# Altium PCB Board.PcbDoc (part 3 of 4)
Units mm, origin at the board's own origin, x right, y up, seen from the top; angles counter-clockwise.
Board outline 88 x 92.5 mm, 2 copper layers (Top Layer, Bottom Layer); 85 components, 67 nets, 346 pads, 106 vias.
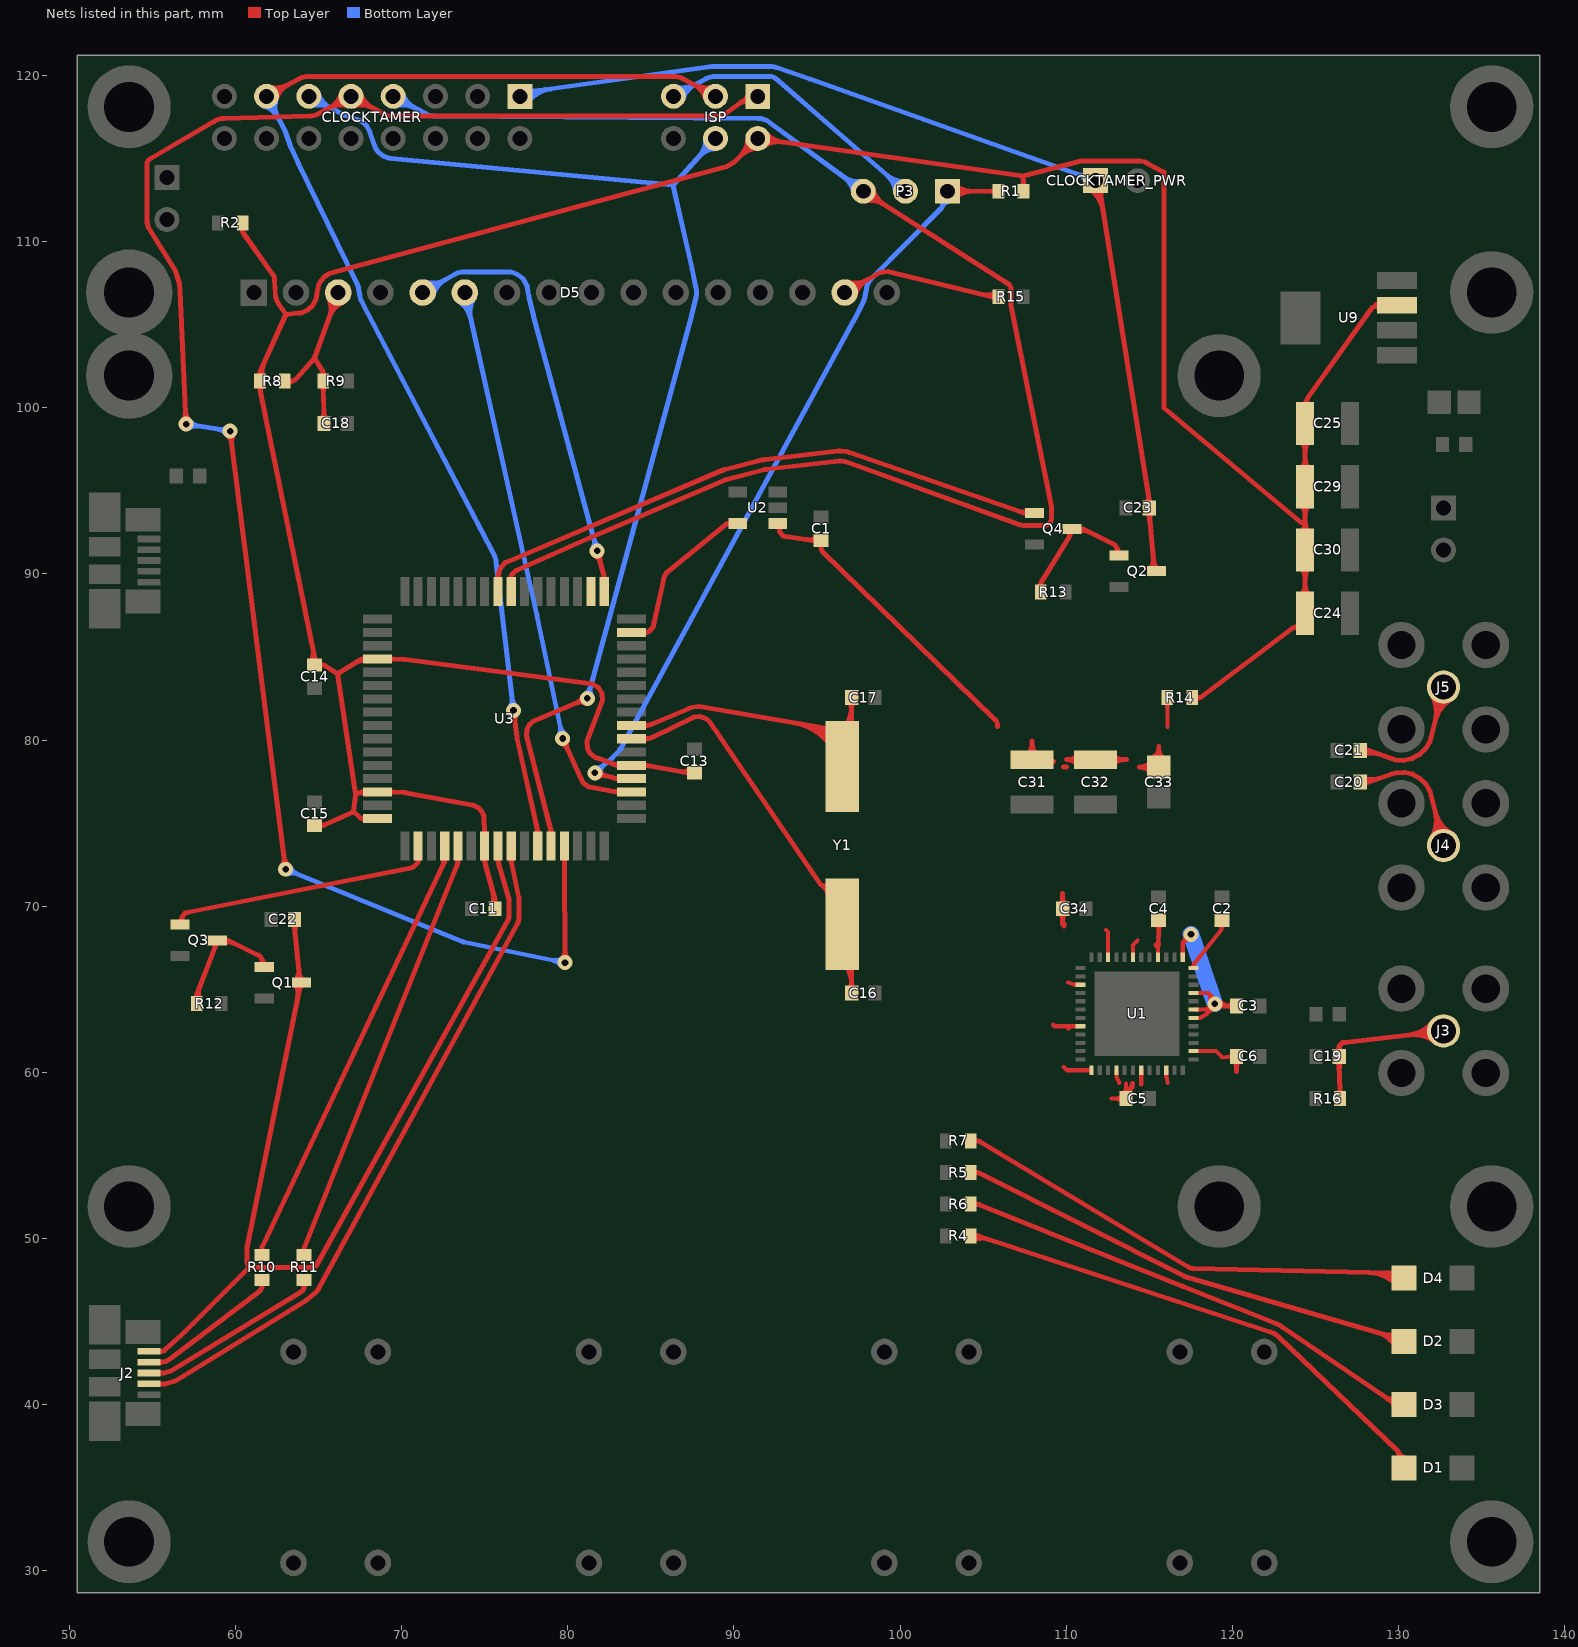
[diagram p3: the nets of this part, all layers, seen from the top]

## Via types
v1: diameter 0.9, hole 0.4, Top Layer to Bottom Layer, tented both sides, 97 vias
v2: diameter 0.8, hole 0.4, Top Layer to Bottom Layer, tented both sides, 9 vias

## Nets (pads, with @x,y where several pads share a name; then routed paths per layer and width w, separated by ;. In a path a pad name is that pad's centre, name@x,y a point inside that pad or via, vN(x,y) a via of type N, cw(c..) or ccw(c..) an arc to the next point about the centre after c; other vN are vias at no path point) (continued)
MISO: CLOCKTAMER.9 ISP.1 U3.13 | length 125.9
  Top Layer w0.3: v1@56.819,99.217 ccw(c56.283,99.704) 57.006,99.739 ccw(c57.73,99.773) v1@57.242,99.237 ; v1(57.041,99.015) 56.657,107.079 56.638,107.469 56.405,108.215 56.198,108.548 54.862,110.69 54.773,110.832 54.68,111.156 54.68,111.325 54.68,114.615 54.68,114.735 54.8,114.943 54.903,115.004 58.735,117.241 58.866,117.318 59.156,117.4 59.307,117.405 64.453,117.545 64.594,117.549 64.864,117.621 64.987,117.687 CLOCKTAMER.9@66.96,118.745 68.933,117.687 69.063,117.618 69.351,117.545 69.5,117.545 88.9,117.545 89.088,117.545 89.444,117.659 89.597,117.768 90.429,118.361 90.486,118.402 90.62,118.445 90.69,118.445 90.84,118.445 ISP.1@91.44,118.745 ; v1@59.504,98.354 cw(c59.061,97.782) 59.779,97.872 cw(c60.498,97.963) v1@59.925,98.407 ; v1(59.688,98.591) v1(63.026,72.226) ; v1@62.789,72.41 ccw(c62.217,72.854) 62.935,72.945 ccw(c63.654,73.035) v1@63.21,72.463 ; CLOCKTAMER.9@66.386,118.919 cw(c64.999,119.337) 65.683,118.061 cw(c66.368,116.784) CLOCKTAMER.9@66.786,118.171 ; CLOCKTAMER.9@67.134,118.171 cw(c67.552,116.784) 68.237,118.061 cw(c68.921,119.337) CLOCKTAMER.9@67.534,118.919 ; v1@79.628,66.812 ccw(c79.112,67.321) 79.837,67.326 ccw(c80.561,67.331) v1@80.052,66.815 ; U3.13@79.712,72.941 cw(c79.505,72.731) 79.8,72.733 ; U3.13@79.717,72.936 cw(c79.556,72.753) 79.8,72.753 ; 79.8,72.724 cw(c80.108,72.726) U3.13@79.889,72.942 ; U3.13@79.8,73.63 79.8,72.905 79.8,72.755 79.8,72.753 ; v1(79.841,66.602) 79.8,72.753 ; U3.13@79.883,72.936 ccw(c80.044,72.753) 79.8,72.753 ; ISP.1@90.716,118.445 cw(c90.716,118.021) ISP.1@91.016,118.321 ; ISP.1@90.841,118.777 cw(c90.455,118.798) 90.573,118.43 cw(c90.706,118.016) ISP.1@91.014,118.322 ; ISP.1@90.85,118.854 cw(c90.255,118.964) 90.44,118.387 cw(c90.647,117.739) ISP.1@91.069,118.274
  Bottom Layer w0.3: v1(57.041,99.015) v1(59.688,98.591) ; v1@57.217,98.772 cw(c57.641,98.185) 57.756,98.901 cw(c57.87,99.616) v1@57.284,99.191 ; v1@59.445,98.415 ccw(c58.858,97.99) 58.973,98.706 ccw(c59.088,99.421) v1@59.512,98.834 ; v1(63.026,72.226) 73.68,67.868 73.709,67.857 73.766,67.839 73.797,67.833 v1(79.841,66.602) ; v1@63.142,71.949 cw(c63.422,71.281) 63.696,71.952 cw(c63.971,72.622) v1@63.303,72.342 ; v1@79.591,66.436 ccw(c78.987,66.036) 79.132,66.746 ccw(c79.276,67.456) v1@79.676,66.852
MOSI: CLOCKTAMER.11 ISP.4 U3.12 | length 78.3
  Top Layer w0.3: U3.12@78.904,74.31 ccw(c78.63,74.541) 78.977,74.63 ; U3.12@78.914,74.32 ccw(c78.721,74.522) 79,74.522 ; U3.12@79,73.63 79,74.355 79,74.505 79,74.522 ; U3.12@79.086,74.32 cw(c79.279,74.522) 79,74.522 ; v1@80.906,82.625 cw(c80.234,82.897) 80.517,82.23 cw(c80.799,81.563) v1@81.071,82.234 ; v1(81.184,82.512) 78.079,81.198 77.929,81.135 77.694,80.913 77.551,80.624 77.517,80.302 77.558,80.145 78.942,74.767 78.942,74.765 78.991,74.573 78.996,74.557 79,74.522
  Bottom Layer w0.3: CLOCKTAMER.11@64.42,118.745 66.393,117.687 66.436,117.665 66.522,117.627 66.567,117.611 67.353,117.339 67.482,117.294 67.712,117.15 67.905,116.957 68.049,116.727 68.094,116.598 68.366,115.812 68.423,115.649 68.622,115.369 68.894,115.155 69.215,115.027 69.387,115.01 86.33,113.4 ; CLOCKTAMER.11@64.594,118.171 cw(c65.012,116.784) 65.697,118.061 cw(c66.381,119.337) CLOCKTAMER.11@64.994,118.919 ; v1@81.035,82.772 ccw(c80.675,83.401) 81.374,83.211 ccw(c82.073,83.02) v1@81.444,82.661 ; v1(81.184,82.512) 87.456,105.513 87.461,105.533 87.726,106.644 87.758,106.778 87.762,107.056 87.733,107.191 87.496,108.318 87.494,108.329 86.33,113.4 ; ISP.4@88.301,116.179 cw(c86.853,116.116) 87.921,115.137 cw(c88.989,114.158) ISP.4@88.926,115.606 ; ISP.4@88.9,116.205 86.33,113.4
ND_CS/D_EN: D5.6 U3.19 | length 40.3
  Top Layer w0.3: v1@79.596,79.817 cw(c79.343,79.138) 80.002,79.439 cw(c80.661,79.739) v1@79.982,79.993 ; v1(79.701,80.098) 80.818,77.651 80.91,77.448 81.263,77.176 81.481,77.138 82.927,76.884 82.939,76.882 82.963,76.88 ; 82.821,76.903 ccw(c82.904,77.374) U3.19@83.178,76.982 ; U3.19@83.158,76.795 ccw(c82.963,76.614) 82.963,76.88 ; U3.19@83.158,76.965 cw(c82.963,77.146) 82.963,76.88 ; U3.19@83.85,76.88 83.125,76.88 82.975,76.88 82.963,76.88
  Bottom Layer w0.3: D5.6@73.462,106.385 cw(c72.621,105.06) 74.152,105.403 cw(c75.684,105.745) D5.6@74.359,106.586 ; D5.6@73.622,106.639 cw(c73.17,105.925) 73.994,106.109 cw(c74.819,106.294) D5.6@74.105,106.746 ; D5.6@73.81,106.934 78.138,87.556 78.141,87.545 v1(79.701,80.098) ; v1@79.45,80.262 ccw(c78.844,80.658) 79.553,80.807 ccw(c80.262,80.955) v1@79.866,80.349
NetC2_2: C2.2 U1.36 | length 4.2
  Top Layer w0.25: 117.662,66.433 ccw(c117.851,66.366) U1.36@117.67,66.28 117.67,66.405 117.67,66.456 117.704,66.553 117.737,66.593 119.261,68.483 119.306,68.54 119.355,68.677 119.355,68.75 119.355,68.875 C2.2@119.38,69.15 ; C2.2@119.213,68.901 cw(c119.107,68.677) 119.355,68.677 cw(c119.653,68.677) C2.2@119.485,68.923
NetC16_2: C16.2 U3.23 Y1.1 | length 32.3
  Top Layer w0.3: U3.23@83.85,80.08 84.575,80.08 84.725,80.08 84.742,80.08 ; U3.23@84.53,80.176 ccw(c84.761,80.45) 84.85,80.103 ; U3.23@84.54,79.994 cw(c84.742,79.801) 84.742,80.08 ; U3.23@84.54,80.166 ccw(c84.742,80.359) 84.742,80.08 ; Y1.1@95.671,70.615 ccw(c94.843,70.571) 95.231,71.304 ccw(c95.589,71.98) Y1.1@96.03,71.355 ; Y1.1@95.674,70.743 ccw(c95.211,70.788) 95.429,71.199 ccw(c95.63,71.579) Y1.1@95.928,71.27 ; Y1.1@96.347,66.979 cw(c94.681,65.241) 97.089,65.292 ; Y1.1@96.555,67.196 cw(c95.39,65.98) 97.073,66.016 ; C16.2@96.909,64.993 ccw(c96.452,65.431) 97.085,65.444 ; C16.2@96.977,65.043 ccw(c96.885,65.226) 97.09,65.229 ; 97.086,65.403 ccw(c97.66,65.415) C16.2@97.263,65.001 ; C16.2@97.09,64.77 97.09,65.07 97.09,65.22 97.09,65.229 ; C16.2@97.205,65.042 cw(c97.303,65.231) 97.09,65.229 ; 84.742,80.08 84.777,80.084 84.793,80.089 84.985,80.138 85.037,80.151 85.137,80.188 85.184,80.21 87.467,81.319 87.612,81.39 87.936,81.421 88.249,81.338 88.513,81.151 88.604,81.017 95.148,71.407 95.211,71.315 95.408,71.21 95.52,71.21 95.67,71.21 Y1.1@96.52,68.91 97.07,66.31 97.07,66.16 97.09,65.229
NetC17_2: C17.2 U3.24 Y1.2 | length 41.7
  Top Layer w0.3: U3.24@83.85,80.88 84.575,80.88 84.725,80.88 84.742,80.88 ; U3.24@84.53,80.976 ccw(c84.761,81.25) 84.85,80.903 ; U3.24@84.54,80.794 cw(c84.742,80.601) 84.742,80.88 ; U3.24@84.54,80.966 ccw(c84.742,81.159) 84.742,80.88 ; 93.694,81.02 cw(c93.13,77.773) Y1.2@95.825,79.671 ; 94.407,80.896 cw(c93.968,78.363) Y1.2@96.07,79.843 ; 94.44,80.891 cw(c94.149,79.212) Y1.2@95.731,79.844 ; 94.969,80.799 cw(c94.735,79.446) Y1.2@96.009,79.956 ; 95.121,80.772 cw(c94.805,78.952) Y1.2@96.316,80.016 ; 95.478,80.711 cw(c95.298,79.653) Y1.2@96.289,80.064 ; 95.488,80.709 cw(c95.311,79.669) Y1.2@96.288,80.066 ; 95.499,80.707 cw(c95.32,79.68) Y1.2@96.288,80.067 ; Y1.2@96.347,80.341 ccw(c94.681,82.079) 97.089,82.028 ; Y1.2@96.555,80.124 ccw(c95.39,81.34) 97.073,81.304 ; C17.2@96.909,82.327 cw(c96.452,81.889) 97.085,81.876 ; 97.086,81.917 cw(c97.66,81.905) C17.2@97.263,82.319 ; C17.2@97.09,82.55 97.09,82.25 97.09,82.1 97.09,82.091 97.07,81.16 97.07,81.01 Y1.2@96.52,78.41 95.67,80.71 95.52,80.71 95.501,80.71 95.462,80.713 95.443,80.717 88.116,81.988 87.903,82.025 87.477,81.976 87.277,81.892 85.133,80.988 85.097,80.972 85.023,80.947 84.985,80.938 84.793,80.889 84.777,80.884 84.742,80.88 ; 95.427,80.719 ccw(c95.565,81.516) 96.031,80.855 cw(c95.565,81.516) 95.427,80.719 ; 95.435,80.718 ccw(c95.568,81.502) 96.028,80.853 cw(c95.568,81.502) 95.435,80.718 ; Y1.2@95.572,80.704 cw(c95.448,79.258) 96.558,80.192 ccw(c95.448,79.258) Y1.2@95.572,80.704 ; Y1.2@95.623,80.7 ccw(c95.664,81.178) 95.973,80.81 cw(c95.664,81.178) Y1.2@95.623,80.7
NetC18_1: C18.1 D5.3 R8.1 R9.2 | length 18.1
  Top Layer w0.3: R8.1@62.98,101.6 63.18,101.6 63.33,101.6 63.427,101.6 ; R8.1@63.129,101.467 cw(c63.426,101.202) 63.426,101.6 ; R8.1@63.129,101.733 ccw(c63.427,101.999) 63.426,101.6 ; R8.1@63.14,101.621 ccw(c63.28,101.727) 63.352,101.566 ; R9.2@65.153,101.354 cw(c64.848,101.03) 65.293,101.043 ; C18.1@65.158,99.281 ccw(c64.687,99.724) 65.333,99.744 ; R9.2@65.17,101.86 ccw(c64.99,102.1) 65.29,102.1 ; C18.1@65.226,99.332 ccw(c65.13,99.519) 65.34,99.522 ; 65.295,100.991 cw(c65.814,101.007) R9.2@65.436,101.363 ; 65.335,99.684 ccw(c65.896,99.701) C18.1@65.511,99.292 ; C18.1@65.34,99.06 65.34,99.36 65.34,99.51 65.34,99.522 ; R9.2@65.41,101.86 cw(c65.59,102.1) 65.29,102.1 ; C18.1@65.457,99.331 cw(c65.561,99.526) 65.34,99.522 ; D5.3@65.601,106.659 cw(c64.18,105.994) 65.655,105.459 cw(c67.13,104.924) D5.3@66.465,106.345 ; D5.3@65.873,106.786 cw(c65.108,106.428) 65.902,106.14 cw(c66.696,105.852) D5.3@66.338,106.617 ; D5.3@66.19,106.934 64.76,102.99 ; 63.427,101.6 63.603,101.679 63.667,101.752 64.76,102.99 ; 64.76,102.99 65.236,102.237 65.262,102.195 65.29,102.1 ; 65.29,102.1 65.29,102.05 65.29,101.9 R9.2@65.29,101.6 65.29,101.3 65.29,101.15 65.29,101.139 65.34,99.522
NetC19_1: C19.1 J3.1 R16.1 | length 17.9
  Top Layer w0.3: C19.1@126.259,60.728 cw(c125.874,60.319) 126.435,60.336 ; C19.1@126.265,61.198 ccw(c125.945,61.562) 126.43,61.562 ; R16.1@126.334,58.657 ccw(c125.956,59.013) 126.475,59.029 ; R16.1@126.376,58.691 ccw(c126.262,58.877) 126.48,58.881 ; 126.437,60.276 cw(c127.083,60.296) C19.1@126.612,60.739 ; 126.477,58.977 ccw(c126.922,58.99) R16.1@126.617,58.666 ; R16.1@126.48,58.42 126.48,58.72 126.48,58.87 126.48,58.881 ; R16.1@126.588,58.689 cw(c126.713,58.885) 126.48,58.881 ; C19.1@126.595,61.198 cw(c126.915,61.562) 126.43,61.562 ; J3.1@132.048,63.027 cw(c130.439,64.3) 130.677,62.262 cw(c130.915,60.224) J3.1@132.188,61.833 ; J3.1@132.284,62.841 cw(c131.242,63.665) 131.396,62.346 cw(c131.55,61.027) J3.1@132.374,62.069 ; J3.1@132.715,62.5 126.784,61.807 126.633,61.79 126.43,61.562 ; 126.43,61.562 126.43,61.41 126.43,61.26 C19.1@126.43,60.96 126.43,60.66 126.43,60.51 126.43,60.498 126.48,58.881
NetC20_1: C20.1 J4.1 | length 15.4
  Top Layer w0.3: C20.1@127.678,77.475 ccw(c127.927,77.984) 128.111,77.448 ; C20.1@127.7,77.47 127.95,77.47 128.1,77.47 128.137,77.47 ; C20.1@127.81,77.745 ccw(c128.377,78.904) 128.796,77.683 ; C20.1@127.916,77.343 cw(c128.137,77.213) 128.137,77.47 ; C20.1@127.916,77.597 ccw(c128.137,77.727) 128.137,77.47 ; J4.1@131.986,74.098 ccw(c130.227,75.155) 132.218,75.651 ccw(c134.21,76.148) J4.1@133.153,74.389 ; J4.1@132.244,73.943 ccw(c131.105,74.627) 132.394,74.948 ccw(c133.682,75.27) J4.1@132.998,74.131 ; J4.1@132.715,73.66 131.97,76.648 131.908,76.897 131.653,77.342 131.283,77.703 130.832,77.948 130.331,78.061 129.819,78.033 129.575,77.95 128.246,77.494 128.211,77.482 128.137,77.47
NetC21_1: C21.1 J5.1 | length 15.4
  Top Layer w0.3: C21.1@127.678,79.37 cw(c127.927,78.861) 128.111,79.397 ; C21.1@127.7,79.375 127.95,79.375 128.1,79.375 128.137,79.375 ; C21.1@127.81,79.1 cw(c128.377,77.941) 128.796,79.162 ; C21.1@127.915,79.248 cw(c128.137,79.118) 128.137,79.375 ; C21.1@127.915,79.502 ccw(c128.137,79.632) 128.137,79.375 ; J5.1@131.986,82.747 cw(c130.227,81.69) 132.218,81.194 cw(c134.21,80.697) J5.1@133.153,82.456 ; J5.1@132.244,82.902 cw(c131.105,82.218) 132.394,81.897 cw(c133.682,81.575) J5.1@132.998,82.714 ; J5.1@132.715,83.185 131.97,80.197 131.908,79.948 131.652,79.502 131.285,79.143 130.835,78.898 130.33,78.784 129.818,78.812 129.575,78.895 128.246,79.351 128.211,79.363 128.137,79.375
NetD1_1: D1.1 R4.1 | length 34.8
  Top Layer w0.3: R4.1@104.21,50.154 cw(c104.45,49.678) 104.617,50.185 ; R4.1@104.255,50.165 104.455,50.165 104.605,50.165 104.64,50.165 ; R4.1@104.345,49.886 cw(c104.912,48.764) 105.305,49.959 ; R4.1@104.418,50.05 cw(c104.641,49.892) 104.64,50.165 ; R4.1@104.419,50.28 ccw(c104.64,50.435) 104.64,50.165 ; D1.1@129.885,36.597 ccw(c129.494,36.951) 129.978,37.158 ccw(c130.561,37.407) D1.1@130.443,36.784 ; D1.1@129.905,36.619 ccw(c129.603,36.92) D1.1@130.03,36.921 ; D1.1@129.967,36.673 ccw(c129.806,36.884) 130.051,36.989 ccw(c130.345,37.114) D1.1@130.339,36.795 ; D1.1@130.33,36.195 130.03,36.795 130.03,36.945 130.03,37.037 129.958,37.206 129.891,37.27 122.785,44.082 122.684,44.179 122.443,44.324 122.31,44.368 104.746,50.143 104.711,50.154 104.64,50.165
NetD2_1: D2.1 R5.1 | length 38.5
  Top Layer w0.3: R5.1@104.255,53.975 104.455,53.975 104.605,53.975 104.658,53.975 ; R5.1@104.414,53.854 cw(c104.658,53.669) 104.658,53.975 ; R5.1@104.414,54.096 ccw(c104.658,54.281) 104.658,53.975 ; 128.814,44.319 cw(c128.352,42.726) D2.1@129.804,43.526 ; 129.098,44.236 ccw(c129.443,45.426) D2.1@130.041,44.341 ; 129.425,44.133 cw(c129.305,43.288) D2.1@130.063,43.678 ; 129.464,44.127 cw(c129.354,43.357) D2.1@130.058,43.687 ; 129.509,44.117 cw(c129.249,43.22) D2.1@130.067,43.67 ; D2.1@129.606,44.115 ccw(c129.606,44.539) D2.1@129.906,44.239 ; D2.1@129.734,43.747 ccw(c129.261,43.693) 129.394,44.15 ccw(c129.557,44.71) D2.1@129.938,44.269 ; D2.1@129.736,43.729 ccw(c129.215,43.654) 129.362,44.16 ccw(c129.542,44.781) D2.1@129.951,44.28 ; D2.1@129.736,43.73 ccw(c129.217,43.656) 129.364,44.159 ccw(c129.543,44.775) D2.1@129.95,44.279 ; D2.1@130.33,43.815 129.73,44.115 129.58,44.115 129.548,44.115 129.485,44.124 129.455,44.133 117.327,47.65 117.275,47.666 117.171,47.706 117.122,47.731 104.807,53.927 104.76,53.951 104.658,53.975 ; 129.368,44.141 ccw(c129.483,44.944) 129.97,44.295 cw(c129.483,44.944) 129.368,44.141
NetD3_1: D3.1 R6.1 | length 32.1
  Top Layer w0.3: R6.1@104.255,52.07 104.455,52.07 104.605,52.07 104.648,52.07 ; R6.1@104.417,51.952 cw(c104.648,51.784) 104.648,52.07 ; R6.1@104.417,52.188 ccw(c104.648,52.356) 104.648,52.07 ; D3.1@129.603,40.305 ccw(c129.604,40.733) D3.1@129.906,40.43 ; D3.1@129.731,39.966 ccw(c129.329,39.94) 129.448,40.325 ccw(c129.586,40.773) D3.1@129.913,40.436 ; D3.1@129.741,39.893 ccw(c129.138,39.779) 129.319,40.365 ccw(c129.529,41.047) D3.1@129.964,40.481 ; D3.1@130.33,40.005 129.73,40.305 129.58,40.305 129.512,40.305 129.383,40.345 129.327,40.383 122.96,44.71 122.877,44.766 122.697,44.862 122.604,44.899 116.996,47.13 116.991,47.132 104.773,52.038 104.733,52.054 104.648,52.07
NetD4_1: D4.1 R7.1 | length 32.5
  Top Layer w0.3: R7.1@104.255,55.88 104.455,55.88 104.605,55.88 104.666,55.88 ; R7.1@104.412,55.757 cw(c104.666,55.558) 104.666,55.88 ; R7.1@104.412,56.003 ccw(c104.666,56.202) 104.666,55.88 ; 128.207,47.957 cw(c128.151,45.545) D4.1@129.896,47.211 ; 128.931,47.94 cw(c128.891,46.252) D4.1@130.113,47.418 ; 129.57,47.925 ccw(c129.581,48.409) D4.1@129.916,48.059 ; D4.1@130.33,47.625 129.73,47.925 129.58,47.925 117.648,48.203 117.57,48.205 117.419,48.248 117.353,48.288 104.837,55.816 104.784,55.847 104.666,55.88
NetJ2_2: J2.2 R10.1 | length 9.8
  Top Layer w0.3: J2.2@54.81,42.56 55.35,42.56 55.5,42.56 55.611,42.56 55.826,42.616 55.924,42.669 56.008,42.716 56.042,42.735 56.105,42.776 56.134,42.798 61.417,46.801 61.501,46.865 61.595,47.054 ; J2.2@55.325,42.603 ccw(c55.521,42.935) 55.618,42.562 ; R10.1@61.46,47.363 cw(c61.175,47.054) 61.595,47.054 ; R10.1@61.595,47.51 61.595,47.31 61.595,47.16 61.595,47.054 ; R10.1@61.73,47.363 ccw(c62.015,47.054) 61.595,47.054
NetJ2_3: J2.3 R11.1 | length 12
  Top Layer w0.3: J2.3@54.81,41.91 55.35,41.91 55.5,41.91 55.709,41.91 56.114,42.023 56.293,42.132 63.919,46.776 64.02,46.837 64.135,47.042 ; R11.1@63.997,47.365 cw(c63.688,47.042) 64.135,47.042 ; R11.1@64.135,47.51 64.135,47.31 64.135,47.16 64.135,47.042 ; R11.1@64.273,47.365 ccw(c64.582,47.042) 64.135,47.042
NetP2_5: ISP.5 P3.2 | length 21.4
  Bottom Layer w0.3: ISP.5@86.36,118.745 88.333,119.803 88.465,119.873 88.753,119.945 88.9,119.945 92.19,119.945 92.271,119.945 92.424,119.888 92.485,119.835 P3.2@100.33,113.03 ; ISP.5@86.534,119.319 ccw(c86.952,120.706) 87.637,119.429 ccw(c88.321,118.153) ISP.5@86.934,118.571 ; P3.2@99.732,112.988 ccw(c98.287,112.885) 99.236,113.979 ccw(c100.185,115.073) P3.2@100.288,113.628
NetQ1_1: Q1.1 Q3.3 R12.1 | length 11.2
  Top Layer w0.3: R12.1@57.556,64.399 ccw(c57.405,64.617) 57.67,64.617 ; R12.1@57.67,64.135 57.67,64.435 57.67,64.585 57.67,64.617 ; R12.1@57.784,64.399 cw(c57.935,64.617) 57.67,64.617 ; 57.832,65.073 ccw(c58.756,64.72) R12.1@57.853,64.317 ; 58.757,67.455 cw(c59.319,67.351) Q3.3@58.995,67.821 ; Q3.3@59.234,67.803 cw(c59.531,66.935) 59.934,67.759 ; Q3.3@59.297,67.845 cw(c59.519,67.648) 59.519,67.945 cw(c59.519,68.242) Q3.3@59.297,68.045 ; Q1.1@61.626,66.452 ccw(c61.443,66.607) 61.646,66.734 ; Q1.1@61.74,66.355 61.615,66.505 61.615,66.655 61.615,66.784 ; Q1.1@61.803,66.491 cw(c61.937,66.784) 61.615,66.784 ; 57.67,64.617 57.682,64.681 57.693,64.71 58.755,67.484 58.77,67.522 58.785,67.604 58.785,67.645 58.785,67.795 Q3.3@58.91,67.945 59.335,67.945 59.485,67.945 59.519,67.945 59.586,67.93 59.617,67.914 61.363,67.059 61.479,67.002 61.615,66.784
NetQ2_1: Q2.1 Q4.3 R13.1 | length 11.2
  Top Layer w0.3: R13.1@108.35,89.16 ccw(c108.173,89.398) 108.47,89.398 ; R13.1@108.47,88.9 108.47,89.2 108.47,89.35 108.47,89.399 ; R13.1@108.59,89.16 cw(c108.767,89.398) 108.47,89.398 ; 110.212,92.319 cw(c110.629,92.2) Q4.3@110.418,92.579 ; Q4.3@110.214,92.637 cw(c109.96,92.496) Q4.3@110.24,92.416 ; 110.22,92.327 cw(c110.475,92.327) Q4.3@110.393,92.568 ; Q4.3@110.669,92.568 cw(c110.966,91.7) 111.369,92.524 ; Q4.3@110.732,92.61 cw(c110.954,92.413) 110.954,92.71 cw(c110.954,93.007) Q4.3@110.732,92.81 ; Q2.1@113.061,91.217 ccw(c112.878,91.372) 113.081,91.499 ; Q2.1@113.175,91.12 113.05,91.27 113.05,91.42 113.05,91.549 ; Q2.1@113.238,91.256 cw(c113.372,91.549) 113.05,91.549 ; 108.47,89.399 108.497,89.493 108.522,89.534 110.153,92.174 110.186,92.227 110.22,92.347 110.22,92.41 110.22,92.56 Q4.3@110.345,92.71 110.77,92.71 110.92,92.71 110.954,92.71 111.021,92.695 111.052,92.679 112.798,91.824 112.914,91.767 113.05,91.549
NRD: U3.34
NRESET: P3.1 R1.1 U3.20 | length 55
  Top Layer w0.3: v1(81.637,78.024) 82.705,77.74 82.715,77.738 82.907,77.689 82.924,77.684 82.958,77.68 ; v1@81.787,77.765 cw(c82.151,77.138) 82.337,77.838 cw(c82.523,78.538) v1@81.896,78.175 ; 82.85,77.703 ccw(c82.939,78.05) U3.20@83.17,77.776 ; U3.20@83.16,77.594 ccw(c82.958,77.401) 82.958,77.68 ; U3.20@83.16,77.766 cw(c82.958,77.959) 82.958,77.68 ; U3.20@83.85,77.68 83.125,77.68 82.975,77.68 82.958,77.68 ; P3.1@102.87,113.03 103.47,113.03 103.62,113.03 105.58,113.03 105.73,113.03 R1.1@105.93,113.03 ; P3.1@103.294,112.606 cw(c104.319,111.581) 104.319,113.03 cw(c104.319,114.479) P3.1@103.294,113.454 ; R1.1@105.789,112.889 ccw(c105.447,112.547) 105.447,113.03 ccw(c105.447,113.513) R1.1@105.789,113.171
  Bottom Layer w0.3: v1(81.637,78.024) 82.619,78.874 82.628,78.882 82.645,78.898 82.653,78.906 83.08,79.333 83.113,79.366 83.169,79.441 83.192,79.482 97.195,105.198 97.291,105.373 97.303,105.395 97.79,106.379 97.829,106.457 97.885,106.625 97.9,106.713 97.98,107.155 98.014,107.343 98.189,107.68 98.323,107.815 102.439,111.963 102.502,112.026 102.57,112.191 102.57,112.28 102.57,112.43 P3.1@102.87,113.03 ; v1@81.658,78.323 ccw(c81.71,79.046) 82.184,78.498 ccw(c82.658,77.95) v1@81.936,78.003 ; P3.1@102.422,112.631 cw(c102.018,112.271) 102.518,112.065 cw(c103.094,111.829) P3.1@102.98,112.44 ; P3.1@102.446,112.606 cw(c102.146,112.306) P3.1@102.57,112.306 ; P3.1@102.5,112.558 cw(c102.326,112.337) 102.586,112.23 cw(c102.885,112.107) P3.1@102.88,112.43
NWR: D5.5 U3.33 | length 33
  Top Layer w0.3: v1@81.622,91.129 cw(c81.266,90.498) 81.964,90.692 cw(c82.662,90.886) v1@82.031,91.242 ; v1(81.77,91.39) 82.19,89.879 82.195,89.86 82.2,89.824 ; U3.33@82.091,89.591 ccw(c81.58,89.881) 82.146,90.038 ; U3.33@82.113,89.62 ccw(c81.918,89.824) 82.2,89.824 ; U3.33@82.2,88.93 82.2,89.655 82.2,89.805 82.2,89.824 ; U3.33@82.287,89.62 cw(c82.482,89.824) 82.2,89.824
  Bottom Layer w0.3: D5.5@71.27,106.934 73.195,108.022 73.336,108.102 73.648,108.184 73.81,108.184 76.35,108.184 76.571,108.184 76.983,108.034 77.321,107.751 77.541,107.372 77.58,107.155 77.66,106.713 77.674,106.645 77.939,105.533 77.943,105.514 v1(81.77,91.39) ; D5.5@71.364,107.271 ccw(c71.59,108.085) 72.006,107.35 ccw(c72.421,106.614) D5.5@71.607,106.84 ; D5.5@71.444,107.56 ccw(c71.864,109.072) 72.636,107.706 ccw(c73.408,106.34) D5.5@71.896,106.76 ; v1@81.51,91.539 ccw(c80.882,91.9) 81.581,92.089 ccw(c82.28,92.278) v1@81.919,91.65
RESET_CT: CLOCKTAMER.7 P3.3 U3.40 | length 98.1
  Top Layer w0.3: U3.40@76.512,89.618 ccw(c76.298,89.832) 76.6,89.832 ccw(c76.902,89.832) U3.40@76.688,89.618 ; 76.594,89.847 ccw(c76.749,89.782) U3.40@76.664,89.638 ; U3.40@76.6,88.93 76.6,89.655 76.6,89.805 76.6,89.86 76.643,89.963 76.683,90.001 76.81,90.126 76.839,90.155 76.904,90.199 76.941,90.216 81.402,92.211 81.417,92.218 89.514,95.669 89.529,95.676 89.561,95.686 89.577,95.691 91.827,96.272 91.863,96.281 91.936,96.294 91.972,96.298 96.346,96.793 96.449,96.804 96.655,96.78 96.753,96.745 107.162,92.973 107.249,92.942 107.428,92.91 107.52,92.91 108.67,92.91 108.76,92.91 108.925,92.979 109.052,93.105 109.12,93.271 109.12,93.36 109.12,93.96 109.12,93.982 109.116,94.027 109.111,94.048 106.688,106.151 106.684,106.171 106.68,106.21 106.68,106.23 106.68,107.13 106.68,107.233 106.581,107.412 106.495,107.467 P3.3@97.79,113.03 ; P3.3@97.919,112.444 cw(c98.231,111.029) 99.011,112.25 cw(c99.791,113.471) P3.3@98.376,113.159
  Bottom Layer w0.3: CLOCKTAMER.7@69.5,118.745 71.473,117.687 71.601,117.619 71.884,117.546 72.031,117.545 91.449,117.405 91.638,117.404 91.997,117.285 92.15,117.172 P3.3@97.79,113.03 ; CLOCKTAMER.7@69.674,118.171 cw(c70.092,116.784) 70.777,118.061 cw(c71.461,119.337) CLOCKTAMER.7@70.074,118.919 ; P3.3@97.197,112.939 ccw(c95.765,112.72) 96.623,113.887 ccw(c97.48,115.055) P3.3@97.699,113.623
SCK: CLOCKTAMER.13 ISP.3 U3.11 | length 86.2
  Top Layer w0.3: CLOCKTAMER.13@61.88,118.745 63.853,119.803 63.985,119.873 64.273,119.945 64.42,119.945 86.36,119.945 86.509,119.945 86.797,119.872 86.927,119.803 ISP.3@88.9,118.745 ; CLOCKTAMER.13@62.054,119.319 ccw(c62.472,120.706) 63.157,119.429 ccw(c63.841,118.153) CLOCKTAMER.13@62.454,118.571 ; v1@76.555,81.553 cw(c76.111,80.981) 76.829,81.071 cw(c77.548,81.161) v1@76.976,81.606 ; v1(76.739,81.79) 76.941,80.183 76.946,80.146 76.958,80.077 76.966,80.041 78.193,74.565 78.197,74.551 78.2,74.52 ; U3.11@78.094,74.297 ccw(c77.647,74.581) 78.164,74.696 ; U3.11@78.114,74.321 ccw(c77.925,74.52) 78.2,74.52 ; U3.11@78.2,73.63 78.2,74.355 78.2,74.505 78.2,74.52 ; U3.11@78.286,74.321 cw(c78.475,74.52) 78.2,74.52 ; ISP.3@88.326,118.571 ccw(c86.939,118.153) 87.623,119.429 ccw(c88.308,120.706) ISP.3@88.726,119.319
  Bottom Layer w0.3: CLOCKTAMER.13@61.706,118.171 cw(c61.288,116.784) 62.564,117.468 cw(c63.841,118.153) CLOCKTAMER.13@62.454,118.571 ; CLOCKTAMER.13@61.88,118.745 62.938,116.772 62.96,116.73 62.998,116.643 63.014,116.598 63.286,115.812 63.296,115.784 63.318,115.728 63.331,115.701 63.782,114.728 63.787,114.716 67.314,107.482 67.351,107.405 67.405,107.241 67.42,107.155 67.5,106.713 67.517,106.618 67.579,106.438 67.622,106.355 75.529,91.235 75.593,91.114 75.674,90.851 75.69,90.715 v1(76.739,81.79) ; v1@76.504,81.976 ccw(c75.935,82.424) 76.655,82.509 ccw(c77.374,82.593) v1@76.925,82.025
TEST_CLK: U2.5 U3.31 | length 11.4
  Top Layer w0.3: U3.31@83.85,86.48 84.575,86.48 84.725,86.48 84.78,86.48 84.883,86.523 84.921,86.562 85.046,86.69 85.091,86.735 85.151,86.846 85.164,86.908 85.78,89.681 85.812,89.829 85.971,90.087 86.089,90.184 89.484,92.957 89.528,92.992 89.634,93.03 ; U3.31@84.538,86.392 cw(c84.752,86.178) 84.752,86.48 cw(c84.752,86.782) U3.31@84.538,86.568 ; U3.31@84.558,86.544 ccw(c84.702,86.629) 84.767,86.474 ; U2.5@89.882,92.916 ccw(c89.634,92.703) 89.634,93.03 ; U2.5@89.882,93.144 cw(c89.634,93.357) 89.634,93.03 ; U2.5@90.24,93.03 89.84,93.03 89.69,93.03 89.634,93.03
UID: J2.4 U3.9 | length 42.5
  Top Layer w0.3: J2.4@54.81,41.26 55.35,41.26 55.5,41.26 55.802,41.26 56.383,41.424 56.641,41.584 64.236,46.266 64.275,46.29 64.35,46.346 64.385,46.377 64.885,46.825 64.914,46.85 64.962,46.911 64.98,46.945 76.952,68.897 77.015,69.014 77.08,69.269 77.08,69.4 77.08,70.3 77.08,70.353 77.069,70.461 77.058,70.513 76.606,72.699 76.603,72.713 76.6,72.741 ; U3.9@76.514,72.939 cw(c76.329,72.741) 76.6,72.741 ; U3.9@76.6,73.63 76.6,72.905 76.6,72.755 76.6,72.741 ; 76.631,72.577 cw(c77.132,72.68) U3.9@76.704,72.961 ; U3.9@76.686,72.939 ccw(c76.871,72.741) 76.6,72.741
USB_BUSVCC: C22.1 J2.1 Q1.3 U3.8 | length 68.4
  Top Layer w0.3: J2.1@54.81,43.21 55.35,43.21 55.5,43.21 55.579,43.21 55.727,43.267 55.785,43.32 56.773,44.212 56.806,44.243 60.87,48.3 ; J2.1@55.326,43.253 ccw(c55.501,43.545) 55.623,43.227 ; C22.1@63.407,68.972 cw(c63.114,68.614) 63.574,68.66 ; C22.1@63.451,68.943 cw(c63.354,68.755) 63.565,68.755 ; C22.1@63.565,69.215 63.565,68.915 63.565,68.765 63.565,68.755 ; Q1.3@63.59,65.322 cw(c62.675,64.715) 63.751,64.498 ; 63.593,68.461 cw(c64.335,68.534) C22.1@63.758,69.007 ; Q1.3@63.599,65.5 ccw(c62.84,66.121) 63.816,66.218 ; C22.1@63.679,68.943 ccw(c63.776,68.755) 63.565,68.755 ; 63.84,65.978 ccw(c64.515,66.045) Q1.3@64.085,65.521 ; 63.865,65.059 cw(c64.07,65.059) Q1.3@64.024,65.259 ; Q1.3@64.008,65.554 cw(c64.028,65.716) 63.865,65.716 ; U3.8@75.714,72.94 cw(c75.521,72.738) 75.8,72.738 ; U3.8@75.8,73.63 75.8,72.905 75.8,72.755 75.8,72.738 ; 75.823,72.63 cw(c76.17,72.719) U3.8@75.896,72.95 ; U3.8@75.886,72.94 ccw(c76.079,72.738) 75.8,72.738 ; 60.87,48.3 61.08,48.265 61.096,48.263 61.128,48.26 61.145,48.26 64.585,48.26 64.694,48.26 64.882,48.37 64.935,48.466 76.423,69.182 76.451,69.232 76.48,69.343 76.48,69.4 76.48,70.3 76.48,70.332 76.471,70.395 76.462,70.426 75.867,72.46 75.858,72.495 75.809,72.687 75.804,72.703 75.8,72.738 ; 60.87,48.3 60.832,48.336 60.767,48.4 60.695,48.568 60.695,48.66 60.695,49.36 60.695,49.382 60.7,49.427 60.704,49.449 63.856,65.016 63.86,65.038 63.865,65.083 63.865,65.105 63.865,65.255 Q1.3@63.99,65.405 63.865,65.555 63.865,65.705 63.865,65.716 ; 63.565,68.755 63.566,68.735 63.567,68.725 63.863,65.75 63.864,65.739 63.865,65.716 ; 63.839,64.932 cw(c64.376,64.824) Q1.3@64.073,65.28 ; 63.839,64.932 cw(c64.376,64.824) Q1.3@64.073,65.28 ; 63.839,64.933 cw(c64.375,64.824) Q1.3@64.073,65.28
USB_DM: R10.2 U3.4 | length 28.7
  Top Layer w0.3: R10.2@61.475,49.17 ccw(c61.295,49.41) 61.595,49.41 ccw(c61.895,49.41) R10.2@61.715,49.17 ; R10.2@61.595,49.01 61.595,49.21 61.595,49.36 61.595,49.41 61.617,49.508 61.638,49.553 72.573,72.637 72.586,72.665 72.6,72.724 72.6,72.755 72.6,72.905 U3.4@72.6,73.63 ; 72.452,72.381 ccw(c71.735,72.721) U3.4@72.482,72.988 ; U3.4@72.512,72.942 cw(c72.298,72.728) 72.6,72.728 cw(c72.902,72.728) U3.4@72.688,72.942
USB_DP: R11.2 U3.5 | length 27.7
  Top Layer w0.3: R11.2@64.017,49.172 ccw(c63.847,49.404) 64.135,49.403 ; R11.2@64.135,49.01 64.135,49.21 64.135,49.36 64.135,49.403 ; R11.2@64.253,49.172 cw(c64.421,49.403) 64.135,49.403 ; U3.5@73.304,72.95 cw(c73.03,72.719) 73.377,72.63 ; U3.5@73.314,72.94 cw(c73.121,72.738) 73.4,72.738 ; U3.5@73.4,73.63 73.4,72.905 73.4,72.755 73.4,72.738 ; U3.5@73.486,72.94 ccw(c73.679,72.738) 73.4,72.738 ; 64.135,49.403 64.151,49.488 64.167,49.527 73.3,72.365 73.313,72.397 73.334,72.462 73.342,72.495 73.391,72.687 73.396,72.704 73.4,72.738
UVCON: Q3.1 U3.2 | length 17.3
  Top Layer w0.3: Q3.1@56.589,69.027 ccw(c56.411,69.356) 56.785,69.356 ; Q3.1@56.66,68.895 56.785,69.045 56.785,69.195 56.785,69.356 ; U3.2@70.912,72.942 cw(c70.698,72.728) 71,72.728 cw(c71.302,72.728) U3.2@71.088,72.942 ; U3.2@70.936,72.922 cw(c70.851,72.778) 71.006,72.713 ; U3.2@71,73.63 71,72.905 71,72.755 71,72.7 70.957,72.597 70.918,72.559 70.79,72.434 70.744,72.388 70.627,72.327 70.563,72.314 57.147,69.636 56.989,69.605 56.785,69.356
VCC: C11.2 C13.1 C14.2 C15.2 C24.2 C25.2 C29.2 C30.2 ISP.2 R1.2 R2.1 R8.2 R14.2 U3.7 U3.21 U3.52 U3.62 U3.64 U9.3 | length 232.1
  Top Layer w0.3: R2.1@60.318,110.866 cw(c60.13,110.62) 60.44,110.62 ; R2.1@60.44,111.125 60.44,110.62 ; R2.1@60.562,110.866 ccw(c60.75,110.62) 60.44,110.62 ; R8.2@61.364,101.863 ccw(c61.205,102.087) 61.48,102.087 ; R8.2@61.371,101.332 cw(c61.242,101.132) 61.48,101.132 ; 61.538,100.829 cw(c62.269,100.978) R8.2@61.647,101.39 ; R8.2@61.589,101.332 ccw(c61.718,101.132) 61.48,101.132 ; R8.2@61.596,101.863 cw(c61.755,102.087) 61.48,102.087 ; R8.2@61.667,101.771 cw(c62.674,102.154) 61.691,102.595 ; C14.2@64.511,84.658 ccw(c63.616,85.251) 64.668,85.465 ; C14.2@64.65,84.739 ccw(c64.538,84.943) 64.77,84.943 ; C15.2@64.77,74.865 65.263,74.865 ; C14.2@64.89,84.739 cw(c65.002,84.943) 64.77,84.943 ; C14.2@65.03,84.385 cw(c65.278,84.225) 65.278,84.52 ; C14.2@65.03,84.655 ccw(c65.278,84.815) 65.278,84.52 ; C15.2@65.034,74.736 cw(c65.263,74.598) 65.263,74.865 ; C15.2@65.034,74.994 ccw(c65.263,75.132) 65.263,74.865 ; 67.222,84.653 cw(c67.699,83.864) U3.52@67.92,84.759 ; 67.401,76.803 cw(c67.605,76.19) U3.62@67.894,76.768 ; 67.647,75.28 ccw(c67.648,75.584) U3.64@67.862,75.369 ; 67.648,75.271 ccw(c67.704,75.416) U3.64@67.841,75.34 ; 67.65,75.28 cw(c67.649,74.98) U3.64@67.861,75.192 ; U3.62@67.861,76.793 ccw(c67.653,76.589) 67.653,76.88 ; U3.62@67.861,76.967 cw(c67.653,77.171) 67.653,76.88 ; U3.52@67.862,84.792 ccw(c67.648,84.578) 67.648,84.88 ccw(c67.648,85.182) U3.52@67.862,84.968 ; U3.64@68.55,75.28 67.675,75.28 67.623,75.28 67.527,75.317 67.489,75.352 67.12,75.69 ; U3.62@69.233,76.787 cw(c69.471,76.521) 69.49,76.877 ; U3.52@69.236,84.789 cw(c69.462,84.55) 69.471,84.879 ; U3.52@69.241,84.966 ccw(c69.441,85.154) 69.433,84.88 ; U3.52@69.242,84.965 ccw(c69.436,85.145) 69.433,84.88 ccw(c69.43,84.63) U3.52@69.243,84.797 ; U3.7@74.908,74.315 ccw(c74.656,74.546) 74.998,74.561 ; U3.7@74.914,72.94 cw(c74.721,72.738) 75,72.738 ; U3.7@74.916,74.322 ccw(c74.743,74.512) 75,74.517 ccw(c75.276,74.521) U3.7@75.086,74.321 ; 75.023,72.63 cw(c75.37,72.719) U3.7@75.096,72.95 ; U3.7@75.086,72.94 ccw(c75.279,72.738) 75,72.738 ; C11.2@75.414,70.025 ccw(c74.546,70.527) 75.514,70.785 ; C11.2@75.508,70.118 ccw(c75.392,70.326) 75.63,70.326 ; C11.2@75.63,69.85 75.63,70.326 ; C11.2@75.752,70.118 cw(c75.868,70.326) 75.63,70.326 ; 81.852,78.898 81.664,78.944 81.359,79.183 81.18,79.525 81.157,79.912 81.225,80.092 82.025,82.192 82.098,82.384 82.062,82.797 81.85,83.151 81.505,83.378 81.3,83.404 70.237,84.852 70.213,84.855 70.168,84.859 70.146,84.86 69.433,84.88 ; 81.852,78.898 81.881,78.891 81.941,78.872 81.97,78.86 82.873,78.5 82.897,78.49 82.949,78.48 ; 82.652,78.588 ccw(c82.918,79.254) U3.21@83.201,78.595 ; U3.21@83.162,78.392 ccw(c82.949,78.179) 82.949,78.48 ; U3.21@83.162,78.568 cw(c82.949,78.781) 82.949,78.48 ; U3.21@84.521,78.377 cw(c84.797,77.976) 84.886,78.455 ; U3.21@84.541,78.395 cw(c84.737,78.212) 84.737,78.48 ; U3.21@84.541,78.565 ccw(c84.737,78.748) 84.737,78.48 ; 86.785,78.106 ccw(c86.943,78.965) C13.1@87.438,78.246 ; 87.159,78.037 cw(c87.099,77.708) C13.1@87.374,77.898 ; C13.1@87.36,77.922 ccw(c87.162,77.815) 87.162,78.04 ; C13.1@87.36,78.158 cw(c87.162,78.265) 87.162,78.04 ; C13.1@87.63,78.04 87.162,78.04 ; ISP.2@90.84,116.204 cw(c89.391,116.2) 90.418,115.178 cw(c91.445,114.156) ISP.2@91.441,115.605 ; ISP.2@91.8,115.725 cw(c92.671,114.567) 92.874,116.001 cw(c93.078,117.436) ISP.2@91.92,116.565 ; R1.2@107.279,113.262 ccw(c106.854,113.634) 107.418,113.671 ; 107.426,113.555 ccw(c107.825,113.582) R1.2@107.562,113.281 ; R1.2@107.43,113.03 107.43,113.48 107.429,113.503 107.4,113.94 ; R14.2@117.59,82.55 118.014,82.55 ; R14.2@117.744,82.423 cw(c118.014,82.201) 118.014,82.55 ; R14.2@117.744,82.677 ccw(c118.014,82.899) 118.014,82.55 ; R14.2@117.772,82.632 ccw(c117.929,82.703) 117.984,82.54 ; C24.2@123.99,86.967 cw(c123.756,87.019) 123.756,86.78 ; C24.2@124.007,87.025 cw(c123.612,87.179) 123.747,86.777 cw(c123.827,86.541) C24.2@124.039,86.671 ; C24.2@124.067,86.63 ccw(c123.756,86.382) 123.756,86.78 ; C24.2@124.097,88.663 ccw(c123.414,89.346) 124.38,89.346 ccw(c125.346,89.346) C24.2@124.663,88.663 ; C30.2@124.097,90.407 cw(c123.414,89.724) 124.38,89.724 cw(c125.346,89.724) C30.2@124.663,90.407 ; C30.2@124.097,92.473 ccw(c123.414,93.156) 124.38,93.156 ; C29.2@124.097,94.217 cw(c123.414,93.534) 124.38,93.534 cw(c125.346,93.534) C29.2@124.663,94.217 ; C29.2@124.097,96.283 ccw(c123.414,96.966) 124.38,96.966 ccw(c125.346,96.966) C29.2@124.663,96.283 ; C25.2@124.097,98.027 cw(c123.414,97.344) 124.38,97.344 cw(c125.346,97.344) C25.2@124.663,98.027 ; C25.2@124.241,100.185 ccw(c124.102,100.56) 124.483,100.439 ccw(c124.721,100.363) C25.2@124.59,100.151 ; C25.2@124.295,100.201 ccw(c124.246,100.43) 124.48,100.43 ; C25.2@124.628,100.124 cw(c124.87,100.43) 124.48,100.43 ; C30.2@124.663,92.473 cw(c125.346,93.156) 124.38,93.156 ; 128.545,106.087 cw(c128.667,105.85) U9.3@128.898,105.984 ; 128.633,106.21 128.7,106.21 128.85,106.21 U9.3@129.9,106.16 128.85,106.11 128.7,106.11 128.591,106.11 ; U9.3@128.87,106.042 ccw(c128.633,105.958) 128.633,106.21 ccw(c128.632,106.547) U9.3@128.911,106.357 ; U9.3@128.877,106.295 cw(c128.721,106.36) 128.671,106.198 cw(c128.57,105.87) U9.3@128.882,106.013 ; U9.3@128.879,106.299 cw(c128.591,106.423) 128.591,106.11 ; U9.3@128.923,105.947 ccw(c128.591,105.692) 128.591,106.11 ; 60.44,110.62 60.474,110.516 60.505,110.471 62.276,107.996 62.314,107.943 62.356,107.82 62.359,107.755 62.401,106.875 62.41,106.695 62.527,106.356 62.631,106.21 63.05,105.62 ; 61.48,101.132 61.48,102.087 ; 61.48,101.132 61.483,101.098 61.487,101.08 64.761,85.01 64.765,84.987 64.77,84.943 ; 61.48,102.087 61.496,102.16 61.511,102.193 63.05,105.62 ; 63.05,105.62 63.771,105.69 63.974,105.71 64.348,105.877 64.647,106.153 64.844,106.512 64.88,106.713 64.96,107.155 64.991,107.329 65.149,107.648 65.389,107.91 65.693,108.095 65.865,108.141 89.368,114.467 89.597,114.528 90.007,114.766 90.176,114.935 ISP.2@91.44,116.205 107.4,113.94 ; 64.77,84.943 C14.2@64.77,84.52 65.278,84.52 ; 65.263,74.865 65.347,74.883 65.386,74.901 67.12,75.69 ; 65.278,84.52 65.389,84.487 65.438,84.456 66.14,84 ; 66.14,84 67.533,84.841 67.565,84.86 67.637,84.88 U3.52@68.55,84.88 69.425,84.88 69.433,84.88 ; 66.14,84 67.24,76.75 ; 67.12,75.69 67.228,76.655 67.229,76.663 67.24,76.75 ; 67.24,76.75 67.588,76.866 67.609,76.873 67.653,76.88 ; 67.653,76.88 U3.62@68.55,76.88 69.425,76.88 69.44,76.88 70.17,76.839 70.2,76.837 70.258,76.83 70.286,76.825 74.236,76.085 74.386,76.056 74.65,75.905 74.85,75.675 74.963,75.39 74.969,75.238 75,74.517 75,74.505 U3.7@75,73.63 75,72.738 ; 75,72.738 75.004,72.703 75.009,72.687 75.058,72.495 75.061,72.484 75.616,70.403 75.623,70.378 75.63,70.326 ; 82.949,78.48 U3.21@83.85,78.48 84.737,78.48 ; 84.737,78.48 84.762,78.478 84.775,78.475 87.108,78.047 87.126,78.043 87.162,78.04 ; 107.4,113.94 110.897,114.85 110.925,114.858 110.982,114.865 114.3,114.865 114.463,114.865 114.78,114.777 114.921,114.692 115.88,114.178 115.88,100 124.127,93.108 124.38,93.156 ; 118.014,82.55 118.153,82.597 118.212,82.641 123.558,86.689 123.617,86.733 123.756,86.78 ; 123.756,86.78 123.98,86.78 C24.2@124.38,87.63 124.38,97.155 C25.2@124.38,99.06 124.48,100.21 124.48,100.43 ; 124.48,100.43 124.522,100.563 124.563,100.621 128.333,105.921 128.397,106.01 128.591,106.11
VCC_CT: C23.1 CLOCKTAMER.1 CLOCKTAMER_PWR.1 Q2.3 | length 86.6
  Top Layer w0.3: CLOCKTAMER_PWR.1@111.408,113.179 cw(c110.213,111.53) 112.224,111.851 ; CLOCKTAMER_PWR.1@111.529,113.111 cw(c111.134,112.163) 112.149,112.325 ; CLOCKTAMER_PWR.1@111.584,113.422 cw(c110.814,112.359) 112.11,112.566 ; CLOCKTAMER_PWR.1@111.647,113.387 cw(c111.391,112.757) 112.062,112.864 ; CLOCKTAMER_PWR.1@111.76,113.665 112.06,113.065 112.06,112.915 112.06,112.897 112.063,112.862 112.066,112.844 114.995,94.493 114.997,94.477 115,94.446 ; CLOCKTAMER_PWR.1@112.06,112.941 cw(c112.484,112.941) CLOCKTAMER_PWR.1@112.184,113.241 ; 112.064,112.853 ccw(c111.373,112.743) 111.644,113.388 cw(c111.377,112.746) 112.064,112.856 ; C23.1@114.798,94.177 ccw(c114.121,94.667) 114.946,94.799 ; C23.1@114.842,93.737 cw(c114.549,93.379) 115.009,93.425 ; C23.1@114.883,94.251 ccw(c114.779,94.446) 115,94.446 ; C23.1@114.886,93.708 cw(c114.789,93.52) 115,93.52 ; 114.998,94.474 ccw(c115.364,94.533) C23.1@115.147,94.232 ; 115.028,93.226 cw(c115.77,93.299) C23.1@115.193,93.772 ; Q2.3@115.034,90.265 ccw(c114.275,90.886) 115.251,90.983 ; C23.1@115.114,93.708 ccw(c115.211,93.52) 115,93.52 ; C23.1@115.117,94.251 cw(c115.221,94.446) 115,94.446 ; 115.275,90.743 ccw(c115.95,90.81) Q2.3@115.52,90.286 ; Q2.3@115.425,90.17 115.3,90.32 115.3,90.47 115.3,90.481 ; Q2.3@115.443,90.319 cw(c115.463,90.481) 115.3,90.481 ; 115,93.52 115.001,93.5 115.002,93.49 115.298,90.515 115.299,90.504 115.3,90.481 ; 115,93.52 115,93.53 115,93.68 C23.1@115,93.98 115,94.28 115,94.43 115,94.446 ; 112.067,112.813 cw(c112.7,112.863) 112.217,113.276 ccw(c112.7,112.863) 112.067,112.813 ; 112.093,112.673 cw(c112.942,112.808) 112.246,113.313 ccw(c112.942,112.808) 112.093,112.673
  Bottom Layer w0.3: CLOCKTAMER.1@77.12,118.745 77.72,119.045 77.87,119.045 77.886,119.045 77.916,119.047 77.932,119.049 88.654,120.528 88.715,120.537 88.837,120.545 88.9,120.545 92.19,120.545 92.277,120.545 92.449,120.516 92.532,120.488 94.539,119.796 94.544,119.794 110.859,113.991 110.896,113.978 110.972,113.965 111.01,113.965 111.16,113.965 CLOCKTAMER_PWR.1@111.76,113.665 ; CLOCKTAMER.1@77.359,118.564 cw(c78.455,117.734) 78.267,119.095 ; CLOCKTAMER.1@77.388,118.61 cw(c78.133,118.235) 78.019,119.061 ; CLOCKTAMER.1@77.544,119.169 ccw(c77.844,119.469) CLOCKTAMER.1@77.844,119.045 ; CLOCKTAMER.1@77.598,118.383 cw(c79.271,117.115) 78.984,119.194 ; CLOCKTAMER.1@77.653,118.47 cw(c78.775,117.892) 78.602,119.142 ; 78.028,119.063 ccw(c78.145,118.218) 77.387,118.608 cw(c78.147,118.215) 78.03,119.063 ; 110.975,113.964 cw(c110.862,113.307) CLOCKTAMER_PWR.1@111.481,113.554 ; CLOCKTAMER_PWR.1@111.021,113.956 cw(c110.922,113.379) CLOCKTAMER_PWR.1@111.476,113.568 ; CLOCKTAMER_PWR.1@111.036,113.965 ccw(c111.036,114.389) CLOCKTAMER_PWR.1@111.336,114.089 ; CLOCKTAMER_PWR.1@111.162,113.622 ccw(c110.751,113.592) 110.888,113.981 ccw(c111.029,114.378) CLOCKTAMER_PWR.1@111.33,114.084 ; CLOCKTAMER_PWR.1@111.164,113.6 ccw(c110.694,113.548) 110.852,113.994 ccw(c111.013,114.449) CLOCKTAMER_PWR.1@111.346,114.099 ; CLOCKTAMER.1@77.482,119.223 ccw(c77.964,119.86) 78.074,119.069 ; CLOCKTAMER.1@77.482,119.223 ccw(c77.964,119.86) 78.074,119.069 ; CLOCKTAMER.1@77.482,119.223 ccw(c77.964,119.859) 78.073,119.069 ; CLOCKTAMER.1@77.482,119.223 ccw(c77.964,119.859) 78.073,119.069 ; CLOCKTAMER.1@77.514,119.197 ccw(c77.912,119.654) 77.954,119.05 cw(c77.912,119.654) CLOCKTAMER.1@77.514,119.197
VCC_LED: D5.15 R15.1 | length 15
  Top Layer w0.3: D5.15@96.67,106.934 98.595,108.022 98.802,108.139 99.275,108.205 99.506,108.148 105.473,106.693 105.499,106.686 105.553,106.68 ; D5.15@96.764,107.271 ccw(c96.99,108.085) 97.406,107.35 ccw(c97.821,106.614) D5.15@97.007,106.84 ; D5.15@96.844,107.56 ccw(c97.264,109.072) 98.036,107.706 ccw(c98.808,106.34) D5.15@97.296,106.76 ; 104.963,106.817 ccw(c105.233,107.926) R15.1@105.826,106.951 ; R15.1@105.764,106.568 ccw(c105.553,106.425) 105.553,106.68 ; R15.1@105.764,106.792 cw(c105.553,106.935) 105.553,106.68 ; R15.1@105.93,106.68 105.73,106.68 105.58,106.68 105.553,106.68
VCCLMK: C1.2 C3.2 C4.2 C5.2 C6.2 C31.2 C32.2 C33.2 C34.1 R14.1 U1.3 U1.8 U1.13 U1.16 U1.19 U1.22 U1.26 U1.30 U1.31 U1.33 U1.37 U1.40 U1.43 U1.46 U2.1 | length 96.6
  Top Layer w0.25: 109.22,62.865 109.305,62.78 U1.8@110.87,62.78 110.538,62.78 ; 109.855,60.325 110.05,60.13 U1.13@111.52,60.13 ; 110.116,62.655 110.132,62.655 110.163,62.66 110.178,62.666 ; 110.116,65.409 110.454,65.298 110.482,65.289 110.54,65.28 U1.3@110.87,65.28 ; 112.395,68.58 112.52,68.455 U1.46@112.52,66.93 ; 112.746,58.42 C5.2@113.6,58.42 113.6,58.87 113.6,59.324 ; U1.16@113.02,60.13 113.02,59.788 113.039,59.706 113.057,59.668 113.196,59.376 ; C5.2@113.406,58.226 ccw(c112.936,57.756) 112.936,58.42 ccw(c112.936,59.084) C5.2@113.406,58.614 ; C5.2@113.406,58.664 ccw(c112.936,59.134) 113.6,59.134 ccw(c114.264,59.134) C5.2@113.794,58.664 ; U1.43@114.02,66.93 114.02,67.665 114.3,67.945 ; 114.52,59.275 U1.19@114.52,60.13 ; C33.2@115.188,78.8 ccw(c114.431,79.651) 115.57,79.651 ; C33.2@115.32,79.07 115.32,78.945 C33.2@115.57,78.37 115.57,79.651 ; C33.2@115.354,78.613 ccw(c114.926,79.094) 115.57,79.094 ccw(c116.214,79.094) C33.2@115.786,78.613 ; C4.2@115.376,68.956 cw(c114.906,68.486) 115.57,68.486 cw(c116.234,68.486) C4.2@115.764,68.956 ; 115.395,67.684 115.395,67.668 115.4,67.637 115.405,67.622 ; 115.52,67.262 U1.40@115.52,66.93 115.52,67.887 115.559,67.927 ; 115.536,68.169 115.559,67.927 ; 115.57,68.169 C4.2@115.57,69.15 115.595,68.875 115.595,68.75 C4.2@115.807,68.963 ; 115.583,67.684 115.559,67.927 ; R14.1@115.931,82.291 cw(c115.547,81.907) 116.09,81.907 cw(c116.633,81.907) R14.1@116.249,82.291 ; C33.2@115.952,78.8 cw(c116.709,79.651) 115.57,79.651 ; U1.22@116.02,60.13 116.02,59.812 116.023,59.778 116.026,59.761 116.092,59.413 116.093,59.404 116.095,59.385 116.095,59.376 ; 116.09,80.807 R14.1@116.09,82.55 ; U1.37@117.02,67.105 U1.37@117.02,66.93 117.02,67.814 ; v1@117.191,68.282 cw(c116.602,68.232) 117.02,67.814 ; v1@117.488,67.985 ccw(c117.438,67.396) 117.02,67.814 ; v1(117.515,68.309) 117.02,67.814 ; U1.26@117.67,61.28 119.021,61.28 119.396,60.905 119.404,60.905 119.418,60.905 119.426,60.906 119.85,60.96 C6.2@120.25,60.96 ; U1.30@117.67,63.28 118.021,63.28 118.121,63.308 118.165,63.335 118.424,63.493 ; U1.31@117.67,63.78 118.596,63.78 ; U1.33@117.67,64.78 118.554,64.78 ; 118.143,63.78 ccw(c118.143,64.676) v1@118.883,64.171 ; 118.587,63.656 cw(c118.945,63.298) v1@118.945,63.804 ; 118.616,63.78 ccw(c118.616,64.353) v1@119.09,64.031 ; v1@118.623,64.085 cw(c117.928,63.989) 118.424,63.493 ; v1@118.643,64.009 cw(c118.446,63.93) 118.596,63.78 ; v1@118.649,64.263 ccw(c118.227,64.453) 118.554,64.78 ; v1@118.825,63.827 ccw(c118.746,63.63) 118.596,63.78 ; 119.812,60.955 cw(c119.831,60.798) C6.2@119.984,60.839 ; 119.818,60.956 ccw(c119.777,61.277) C6.2@120.033,61.079 ; 118.424,63.493 118.945,64.014 v1(118.945,64.129) ; 118.554,64.78 118.945,64.389 v1(118.945,64.129) ; 118.596,63.78 v1(118.945,64.129)
  Top Layer w0.3: U2.1@92.64,93.03 92.74,92.855 92.74,92.705 92.74,92.538 92.957,92.285 93.123,92.26 94.74,92.014 94.755,92.012 94.785,92.01 ; 94.439,92.06 ccw(c94.563,92.875) C1.2@95.052,92.211 ; 94.748,92.013 cw(c94.69,91.635) C1.2@94.999,91.862 ; C1.2@94.979,91.893 ccw(c94.785,91.791) 94.785,92.01 ; C1.2@94.979,92.127 cw(c94.785,92.229) 94.785,92.01 ; 105.876,80.807 105.876,80.938 105.774,81.181 105.679,81.273 95.386,91.288 95.321,91.351 95.25,91.519 95.25,91.61 C1.2@95.25,92.01 94.785,92.01 ; C31.2@107.667,79.103 ccw(c106.984,79.786) 107.95,79.786 ccw(c108.916,79.786) C31.2@108.233,79.103 ; 107.95,79.951 C31.2@107.95,78.82 ; C31.2@108.723,78.797 C31.2@108.7,78.82 ; C31.2@108.723,78.843 C31.2@108.7,78.82 ; C31.2@109.025,78.495 109.25,78.72 109.1,78.72 C31.2@107.95,78.82 ; C34.1@109.59,69.6 109.79,69.4 ; C34.1@109.59,70.1 C34.1@109.79,70.3 ; C34.1@109.613,69.623 cw(c109.186,69.196) 109.79,69.196 cw(c110.394,69.196) C34.1@109.967,69.623 ; C34.1@109.613,70.077 ccw(c109.186,70.504) 109.79,70.504 ccw(c110.394,70.504) C34.1@109.967,70.077 ; C34.1@109.767,69.923 109.79,69.9 C34.1@109.79,69.85 ; 109.79,68.946 109.79,69.4 ; 109.79,70.754 C34.1@109.79,70.3 ; 109.85,78.37 110.006,78.37 ; 109.872,68.819 109.872,68.946 ; 110.006,78.82 C32.2@111.76,78.82 ; C32.2@110.685,78.495 110.46,78.72 110.61,78.72 C32.2@111.76,78.82 ; C32.2@110.727,78.537 ccw(c110.044,77.854) 110.044,78.82 ccw(c110.044,79.786) C32.2@110.727,79.103 ; C32.2@110.987,78.797 111.01,78.82 C32.2@111.76,78.82 ; C32.2@112.533,78.797 C32.2@112.51,78.82 ; C32.2@112.533,78.843 C32.2@112.51,78.82 ; C32.2@112.793,78.537 cw(c113.476,77.854) 113.476,78.82 cw(c113.476,79.786) C32.2@112.793,79.103 ; C32.2@112.835,78.495 113.06,78.72 112.91,78.72 C32.2@111.76,78.82 ; C5.2@113.554,58.45 cw(c113.914,58.605) 113.704,58.936 ; C5.2@113.556,58.446 cw(c113.869,58.618) 113.677,58.919 ; 113.6,58.87 113.814,59.006 113.867,59.04 113.946,59.139 113.967,59.198 113.989,59.261 113.995,59.276 114,59.308 114,59.324 ; 113.641,78.82 C32.2@111.76,78.82 ; C5.2@113.819,58.59 cw(c114.151,58.772) 113.948,59.091 ; C33.2@115.143,78.024 ccw(c114.416,77.434) 114.416,78.37 ; C33.2@115.143,78.716 cw(c114.416,79.306) 114.416,78.37 ; C33.2@115.57,78.37 114.416,78.37 ; v1@119.177,64.319 ccw(c119.85,64.869) 119.85,64 ; v1@119.245,64.144 ccw(c119.396,64.152) 119.396,64 C3.2@119.85,64 ; C6.2@120.05,60.71 C6.2@120.25,60.51 ; C6.2@120.073,60.733 cw(c119.646,60.306) 120.25,60.306 cw(c120.854,60.306) C6.2@120.427,60.733 ; C3.2@120.073,63.823 ccw(c119.646,63.396) 119.646,64 ccw(c119.646,64.604) C3.2@120.073,64.177 ; C3.2@120.075,64.225 C3.2@119.85,64 ; C6.2@120.227,60.887 120.25,60.91 C6.2@120.25,60.96 C6.2@120.25,60.51 ; 120.25,60.056 C6.2@120.25,60.51 ; C3.2@120.25,64 C3.2@119.85,64 ; C31.2@107.95,78.82 C31.2@108.7,78.82 ; 109.79,69.4 C34.1@109.79,69.85 ; C34.1@109.79,69.85 C34.1@109.79,70.3 ; C32.2@111.76,78.82 C32.2@112.51,78.82
  Bottom Layer w1: v1(117.515,68.309) v1(118.945,64.129)
VCON_CT: Q4.1 U3.41 | length 37.5
  Top Layer w0.3: U3.41@75.714,89.62 ccw(c75.521,89.822) 75.8,89.822 ; U3.41@75.8,88.93 75.8,89.655 75.8,89.805 75.8,89.822 ; 75.823,89.93 ccw(c76.17,89.841) U3.41@75.896,89.61 ; U3.41@75.886,89.62 cw(c76.079,89.822) 75.8,89.822 ; 107.178,93.761 ccw(c107.425,94.474) Q4.1@107.755,93.795 ; Q4.1@107.706,93.563 ccw(c107.495,93.383) 107.495,93.66 ; Q4.1@107.706,93.757 cw(c107.495,93.937) 107.495,93.66 ; Q4.1@108.095,93.66 107.67,93.66 107.52,93.66 107.495,93.66 ; 75.8,89.822 75.804,89.856 75.809,89.873 75.858,90.065 75.918,90.302 76.238,90.675 76.464,90.771 89.279,96.221 89.316,96.237 89.39,96.262 89.427,96.272 91.678,96.853 91.734,96.867 91.847,96.888 91.905,96.895 96.278,97.389 96.445,97.408 96.78,97.371 96.939,97.316 107.422,93.677 107.445,93.668 107.495,93.66